# Altium PCB FPGA_Board.PcbDoc (part 9 of 10)
Units mm, origin at the board's own origin, x right, y up, seen from the top; angles counter-clockwise.
Board outline 103.63 x 86.08 mm, 2 copper layers (Top Layer, Bottom Layer); 109 components, 200 nets, 667 pads, 237 vias.
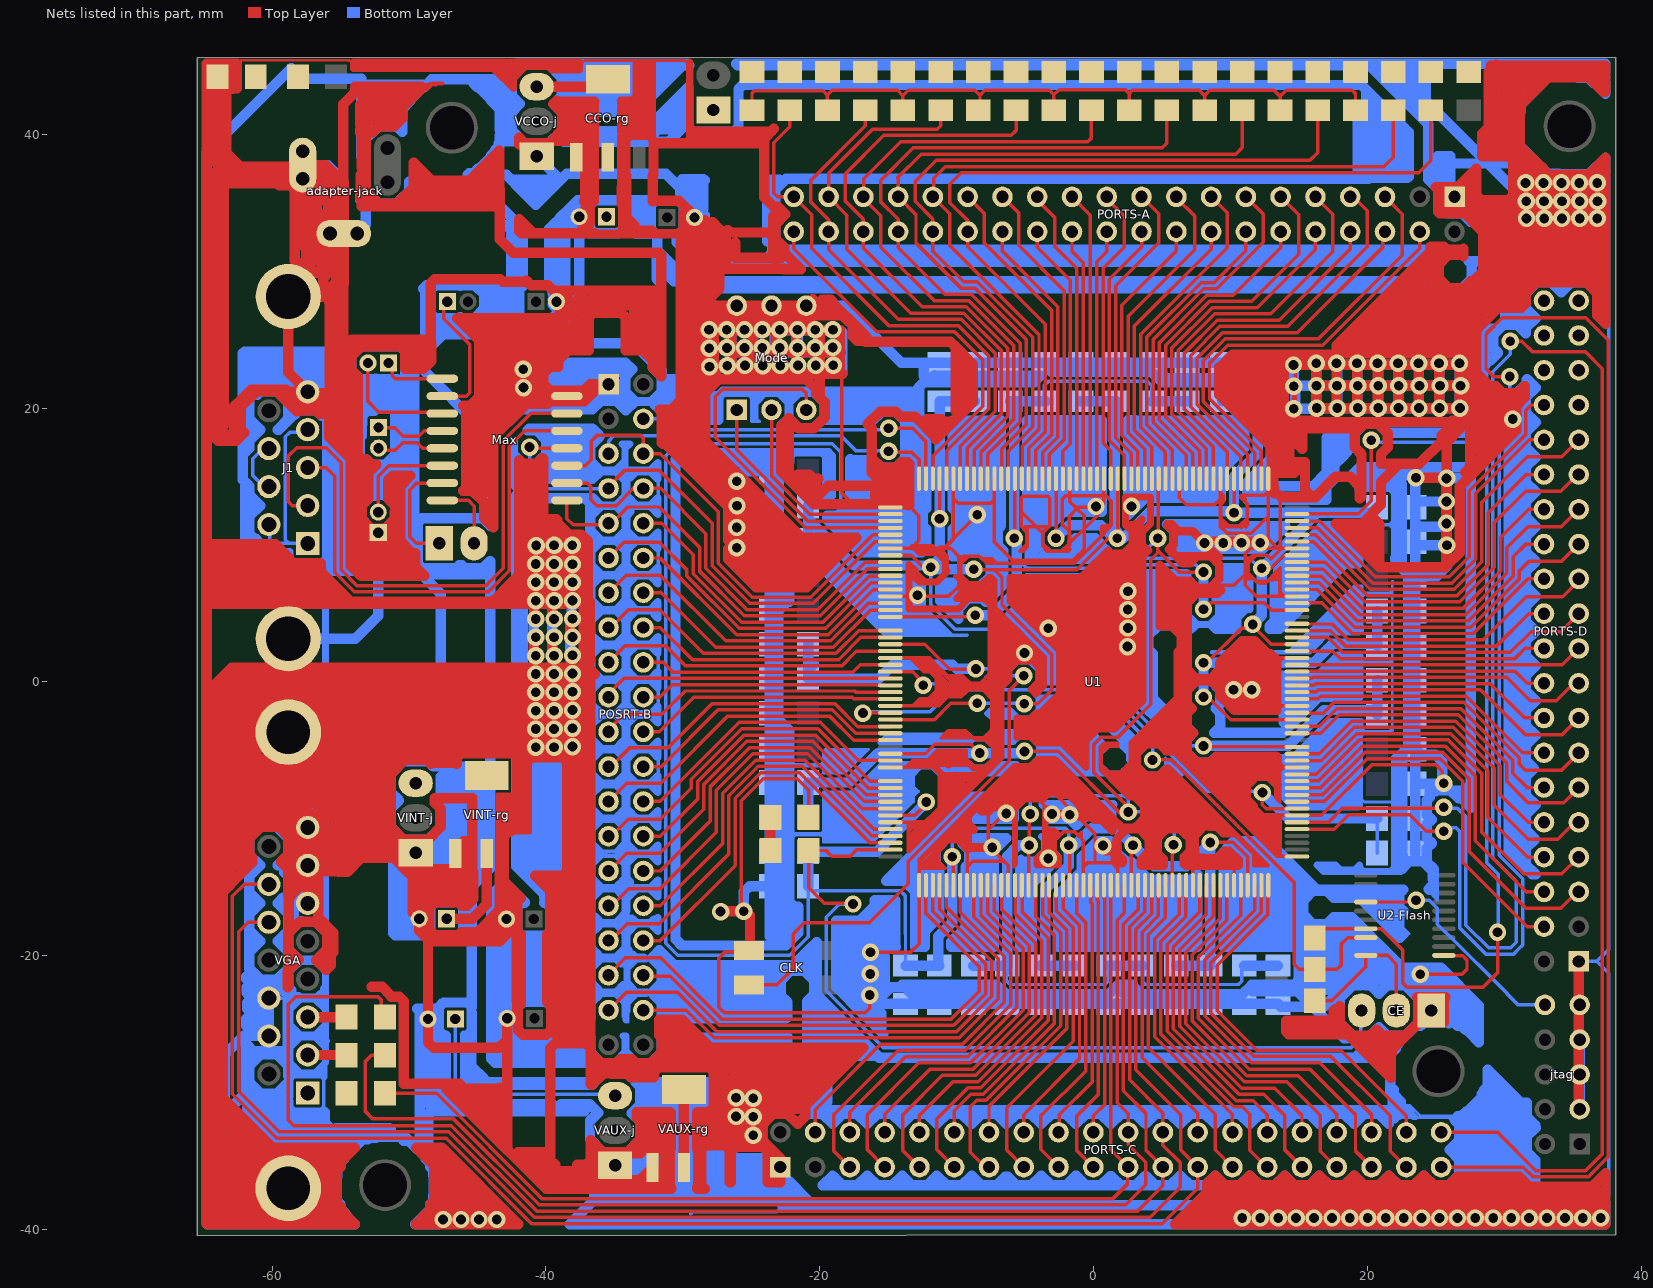
[diagram p9: the nets of this part, all layers, seen from the top]

## Via types
v1: diameter 1.27, hole 0.711, Top Layer to Bottom Layer, 237 vias

## Nets (pads, with @x,y where several pads share a name; then routed paths per layer and width w, separated by ;. In a path a pad name is that pad's centre, name@x,y a point inside that pad or via, vN(x,y) a via of type N, cw(c..) or ccw(c..) an arc to the next point about the centre after c; other vN are vias at no path point) (continued)
GND: (continued)
  Bottom Layer w0.762: 30.333,18.548 30.333,-12.366 32.032,-14.065 32.276,-14.065 31.559,-13.348 31.559,-12.166 32.238,-11.487 31.559,-10.808 31.559,-9.702 32.276,-8.985 31.559,-8.268 31.559,-6.92 32.155,-6.324 31.559,-5.728 31.559,-4.622 32.276,-3.905 31.559,-3.188 31.559,-2.082 32.276,-1.365 31.559,-0.648 31.559,0.458 32.276,1.175 31.559,1.892 31.559,2.998 32.276,3.715 31.559,4.432 31.559,5.538 32.276,6.255 31.559,6.972 31.559,8.078 32.276,8.795 31.559,9.512 31.559,10.618 32.276,11.335 31.559,12.052 31.559,13.158 32.276,13.875 31.559,14.592 31.559,15.698 32.276,16.415 31.559,17.132 31.559,18.238 32.276,18.955 31.559,19.672 31.559,20.778 32.276,21.495 31.652,22.12 31.619,22.087 31.619,21.795 31.111,21.287 31.111,20.655 30.333,19.877 v1@30.333,18.92 ; 30.598,26.094 30.543,26.149 30.543,28.322 30.901,28.322 30.998,28.419 30.998,26.752 31.182,26.568 31.55,26.568 31.076,26.094 30.93,26.094 ; 30.598,26.094 30.93,26.094 ; 30.763,-33.465 31.697,-32.531 31.264,-32.098 ; 30.93,26.094 31.559,25.465 31.559,25.858 32.276,26.575 31.559,27.292 31.559,28.398 32.038,28.877 ; 31.067,-31.439 31.067,-31.222 29.405,-29.56 29.198,-29.56 29.001,-29.757 29.001,-30.199 29.021,-30.179 29.985,-30.179 29.985,-30.307 30.467,-30.789 28.893,-30.789 28.893,-31.134 29.198,-31.439 31.067,-31.439 ; 31.067,-31.439 31.067,-31.901 31.264,-32.098 ; 31.067,-31.439 31.136,-31.439 31.264,-31.567 31.264,-32.098 ; v1@31.579,35.112 31.587,35.104 32.239,34.452 33.091,33.6 35.456,33.6 36.112,32.944 ; 31.725,42.698 31.725,42.714 31.741,42.73 31.741,42.942 31.773,42.974 ; 31.725,42.698 31.773,42.746 ; 31.725,42.698 31.125,42.098 31.125,39.149 33.142,37.132 33.99,37.132 34.058,37.064 36.159,37.064 37.387,38.292 37.387,37.175 37.097,37.175 36.938,37.016 36.784,37.016 v1@32.66,37.016 ; 31.773,42.746 31.773,42.974 ; 31.773,42.746 32.603,43.576 ; 31.773,42.974 31.773,43.323 32.026,43.576 ; 31.773,42.974 32.375,43.576 ; 32.026,43.576 32.359,43.909 32.391,43.877 32.533,43.877 32.533,43.734 32.375,43.576 ; 32.026,43.576 32.375,43.576 ; 32.038,28.877 32.34,29.179 33.466,29.179 ; 32.375,43.576 32.603,43.576 ; 32.603,43.576 33.21,44.183 35.31,44.183 ; v1@32.66,37.016 31.852,37.016 31.598,37.27 31.598,37.777 31.804,37.777 32.105,37.476 32.105,37.571 v1@32.66,37.016 ; v1@32.66,37.016 32.85,36.826 37.387,36.826 37.387,31.669 36.508,32.548 ; 33.466,29.179 34.88,29.179 ; 33.466,29.179 33.466,29.159 34.163,28.462 34.88,29.179 ; 34.88,29.179 35.116,29.179 ; 35.31,44.183 35.379,44.114 36.13,44.114 ; 35.31,44.183 36.062,44.183 36.13,44.114 ; 36.112,32.944 36.669,32.944 36.78,33.055 37.018,32.817 37.018,32.548 36.508,32.548 ; 36.112,32.944 36.508,32.548 ; 36.13,44.114 36.495,43.75 36.592,43.75 ; 36.13,44.114 36.227,44.114 36.408,43.933 ; 36.408,43.933 36.592,43.75 ; 36.592,43.75 37.387,43.75 37.387,42.955 36.592,43.75 ; v1@36.731,-38.783 v1@37.133,-38.783 ; v1@36.731,-38.783 37.133,-38.381 v1@37.133,-38.783 ; v1@37.133,-38.783 v1@37.387,-38.783
  other v1: -26.113,-30.38 -40.745,-4.777 -39.407,-4.781 -39.407,-3.442 -40.745,-3.438 -38.063,-3.391 -40.745,-2.1 -38.063,-2.059 -40.745,-0.761 -39.407,-0.764 -38.063,-0.726 -40.745,0.577 -39.407,0.575 -38.063,0.607 -40.745,1.916 -39.407,1.914 -38.063,1.939 -40.745,3.255 -39.407,3.253 -38.063,3.272 -40.745,4.593 -39.407,4.592 -38.063,4.605 -40.745,5.932 -39.407,5.931 -38.063,5.938 -40.745,7.27 -39.407,7.27 -38.063,7.27 -39.407,8.609 -38.063,8.603 14.625,19.95 -28.055,23.024 -26.757,23.093 -25.468,23.113 -24.176,23.102 -22.894,23.11 -21.597,23.116 -20.3,23.11 -19.017,23.137 -28.074,24.367 -26.785,24.394 -25.496,24.394 -24.207,24.4 -22.919,24.4 -21.63,24.4 -20.341,24.402 -28.086,25.716 -26.794,25.716 -25.502,25.716 -24.21,25.716 -22.918,25.716 -21.625,25.716 -20.333,25.716 -19.041,25.716 35.496,33.855 36.789,33.855 31.596,35.112 32.899,35.112 34.202,35.112 35.506,35.112 32.858,36.446 34.167,36.446 35.475,36.446 36.784,36.446
M0: Mode.1 U1.55 | length 16.3
  Top Layer w0.254: Mode.1@-26.065,19.865 -26.065,16.945 -20.87,11.75 U1.55@-14.847,11.75
M1: Mode.2 U1.54 | length 14.7
  Top Layer w0.254: Mode.2@-23.525,19.865 -23.525,15.051 -20.724,12.25 U1.54@-14.847,12.25
M2: Mode.3 U1.56 | length 26.7
  Top Layer w0.254: Mode.3@-20.985,19.865 -20.985,21.1 -21.27,21.385 -27.09,21.385 -27.65,20.825 -27.65,17.883 -21.017,11.25 U1.56@-14.847,11.25
Net390_2: 390.2 CE.2 U2-Flash.10 | length 11.7
  Top Layer w0.254: 390.2@16.15,-23.275 17.4,-23.275 19.875,-20.8 U2-Flash.10@19.875,-19.975 21.475,-19.975 22.11,-20.61 CE.2@22.11,-24.2
Neta-rs232_1: a-rs232.1 Max.7 | length 8.4
  Top Layer w0.254: a-rs232.1@-47.795,10.125 -49.482,10.125 -49.948,10.591 -49.948,14.012 -49.435,14.525 Max.7@-47.571,14.525
Neta-rs232_2: a-rs232.2 Max.8 | length 5.2
  Top Layer w0.254: Max.8@-47.571,13.255 -45.662,13.255 -45.232,12.825 -45.232,10.148 a-rs232.2@-45.255,10.125
Netblue_1: blue.1 PORTS-C.23 U1.137 | length 108
  Top Layer w0.254: blue.1@-51.763,-24.475 -52.014,-24.224 -52.014,-23.243 -52.267,-22.99 -58.277,-22.99 -58.828,-23.541 -58.828,-31.998 -58.419,-32.407 -46.919,-32.407 -40.679,-38.647 3.211,-38.647 5.058,-36.8 PORTS-C.23@5.058,-35.435 3.825,-34.202 3.825,-31.525 2.167,-29.867 2.167,-17.708 3.275,-16.6 3.275,-15.801 3.273,-15.799 3.273,-14.87 U1.137@3.253,-14.85
Netblue_2: blue.2 VGA.3 | length 3
  Top Layer w0.762: VGA.3@-57.402,-24.48 blue.2@-54.458,-24.48 ; blue.2@-54.568,-24.48 blue.2@-54.563,-24.475
NetC1_1: C1.1 Max.1 | length 4.7
  Top Layer w0.254: C1.1@-51.25,23.3 -51.227,23.277 -51.227,22.375 -50.997,22.145 Max.1@-47.571,22.145
NetC1_2: C1.2 Max.3 | length 8.6
  Top Layer w0.254: C1.2@-53,23.3 -53,20.5 -52.2,19.7 -47.666,19.7 Max.3@-47.571,19.605
NetC2_1: C2.1 Max.4 | length 5.1
  Top Layer w0.254: C2.1@-52.225,18.575 -51.046,18.575 -50.421,17.95 -49.28,17.95 -48.895,18.335 Max.4@-47.571,18.335
NetC2_2: C2.2 Max.5 | length 5.1
  Top Layer w0.254: C2.2@-52.225,17.075 -52.054,16.904 -51.032,16.904 -50.461,17.475 -49.4,17.475 -49,17.075 -48.21,17.075 -48.2,17.065 Max.5@-47.571,17.065
NetC4_1: C4.1 Max.2 | length 9.5
  Top Layer w0.254: Max.2@-47.571,20.875 -45.823,20.875 -45.573,21.125 -45.573,24.645 -47.453,26.525 C4.1@-47.453,27.775
NetC5_2: C5.2 Max.6 | length 7.4
  Top Layer w0.254: C5.2@-52.25,12.65 -52.25,15.016 -51.491,15.775 -47.591,15.775 Max.6@-47.571,15.795
NetCCO-rg_2: CCO-rg.2 CCO-rg.4 VCCO-j.3 Vcco.1 | length 5.4
  Top Layer w0.762: VCCO-j.3@-40.678,43.48 -36.024,43.48 CCO-rg.4@-35.479,44.025
NetCE_3: CE.3 Config-Done.1 U1.103 | length 63.4
  Top Layer w0.254: v1(-17.575,-16.225) -17.625,-16.175 -19.675,-16.175 -20.805,-15.045 Config-Done.1@-20.805,-12.313 -19.544,-12.313 -19.135,-12.722 -17.776,-12.722 -17.323,-12.27 -15.409,-12.27 -15.389,-12.25 U1.103@-14.847,-12.25
  Bottom Layer w0.254: v1(-17.575,-16.225) -18.575,-16.225 -19.525,-17.175 -19.525,-22.55 -15.35,-26.725 18.8,-26.725 19.525,-26 19.525,-24.245 CE.3@19.57,-24.2
NetCF-4.7k_2: CF-4.7k.2 U1.207 U2-Flash.7 | length 74.2
  Top Layer w0.254: U1.207@15.35,12.27 19.32,12.27 20.275,13.225 v1(20.275,17.65) ; CF-4.7k.2@16.15,-18.7 16.825,-18.025 U2-Flash.7@19.875,-18.025 21.009,-18.025 22.567,-19.583 22.567,-21.992 22.89,-22.315 28.435,-22.315 29.5,-21.25 v1(29.5,-18.275) v1@29.8,-18.275
  Bottom Layer w0.254: v1(20.275,17.65) 20.425,17.5 27.425,17.5 28.707,16.218 28.707,-13.2 29.55,-14.043 29.55,-18.225 v1(29.5,-18.275)
NetCLK_3: CLK.3 U1.77 | length 45.4
  Top Layer w0.254: CLK.3@-25.175,-22.125 -23.15,-22.125 -21.925,-20.9 -21.925,-18.4 -21.125,-17.6 -16.4,-17.6 -13.528,-14.728 -13.528,-13.1 -6.175,-5.747 -6.175,-0.625 v1(-5.1,0.45) ; U1.77@-14.847,0.75 -13.225,0.75 -12.8,0.325 -12.8,0.1 v1(-12.45,-0.25)
  Bottom Layer w0.254: v1(-12.45,-0.25) -12.328,-0.128 -6.778,-0.128 -6.2,0.45 v1(-5.1,0.45)
NetConfig-Done_2: Config-Done.2 R-Done.1 | length 2.4
  Top Layer w0.762: Config-Done.2@-23.605,-12.313 R-Done.1@-23.605,-9.9
NetGReen_1: GReen.1 PORTS-C.22 U1.135 | length 88.7
  Top Layer w0.254: GReen.1@-51.763,-27.263 -52.741,-27.263 -53.185,-27.707 -53.185,-31.379 -52.675,-31.889 -46.79,-31.889 -40.49,-38.189 2.35,-38.189 3.817,-36.723 3.817,-35.097 2.518,-33.798 PORTS-C.22@2.518,-32.895 2.518,-31.533 1.71,-30.725 1.71,-17.415 2.25,-16.875 2.25,-14.853 U1.135@2.253,-14.85
NetGReen_2: GReen.2 VGA.2 | length 3
  Top Layer w0.762: VGA.2@-57.402,-27.25 GReen.2@-54.465,-27.25 ; GReen.2@-54.575,-27.25 GReen.2@-54.563,-27.263
NetJ1_1: J1.1 J1.4 J1.6 | length 13.8
  Bottom Layer w0.254: J1.6@-60.242,11.495 -60.175,11.428 -60.175,10.35 -59.935,10.11 -58.762,10.11 ; J1.1@-57.402,10.11 -58.762,10.11 ; J1.4@-57.402,18.42 -57.572,18.25 -58.685,18.25 -59.037,17.898 -59.037,10.385 -58.762,10.11
NetJ1_2: J1.2 Max.14 | length 45.2
  Top Layer w0.254: J1.2@-57.402,12.88 -58.537,12.88 -58.839,13.182 -58.839,16.468 -58.207,17.1 -56.054,17.1 -54.961,16.007 -54.961,8.192 -53.805,7.036 -44.391,7.036 -43.131,8.296 -43.131,17.6 -41.126,19.605 Max.14@-38.471,19.605
  Bottom Layer w0.254: J1.2@-57.402,12.88 J1.2@-57.147,12.625
NetJ1_3: J1.3 Max.13 | length 37.3
  Top Layer w0.254: J1.3@-57.708,15.65 J1.3@-57.402,15.65 -56.043,15.65 -55.418,15.025 -55.418,8.002 -53.994,6.579 -44.202,6.579 -42.674,8.107 -42.674,17.203 -41.542,18.335 Max.13@-38.471,18.335
NetJ1_7: J1.7 J1.8 | length 4.2
  Bottom Layer w0.254: J1.7@-60.242,14.265 -60.615,14.265 -61.425,15.075 -61.425,16.3 -60.69,17.035 J1.8@-60.242,17.035
Netjtag_10: jtag.10 U2-Flash.4 | length 17
  Top Layer w0.254: U2-Flash.4@19.875,-16.075 v1@23.575,-16.075
  Bottom Layer w0.254: v1(23.55,-15.95) 24.525,-15.95 25.107,-16.532 25.107,-17.703 25.689,-18.286 25.725,-18.286 30.225,-22.785 30.225,-22.822 30.993,-23.59 jtag.10@32.96,-23.59
NetLED1_1: LED1.1 RL-1.1
NetLED1_2: LED1.2 PORTS-A.30 U1.36 | length 64
  Top Layer w0.254: U1.36@-4.747,14.85 U1.36@-4.727,14.87 ; U1.36@-4.727,15.275 -4.727,17.059 -3.533,18.253 -3.533,26.111 -9.2,31.778 PORTS-A.30@-9.2,32.889 -9.2,33.7 -10.5,35 -10.5,36.35 -9.675,37.175 23.75,37.175 24.633,38.058 LED1.2@24.633,41.75
NetLED2_1: LED2.1 RL-2.1
NetLED2_2: LED2.2 PORTS-A.31 U1.37 | length 62.7
  Top Layer w0.254: U1.37@-5.247,14.85 U1.37@-5.227,14.87 ; U1.37@-5.227,15.5 -5.227,17.206 -3.99,18.443 -3.99,25.365 -10.5,31.875 -10.5,34.189 PORTS-A.31@-11.74,35.429 -11.675,35.494 -11.675,36.8 -10.843,37.632 21.2,37.632 21.879,38.311 LED2.2@21.879,41.75
NetLED3_1: LED3.1 RL-3.1
NetLED3_2: LED3.2 PORTS-A.32 U1.39 | length 59.9
  Top Layer w0.254: U1.39@-6.247,14.85 -6.227,14.87 -6.227,16.852 -4.447,18.632 -4.447,25.176 -8.497,29.225 -9.5,29.225 -11.74,31.465 PORTS-A.32@-11.74,32.889 -11.74,33.807 -13.025,35.092 -13.025,36.55 -11.486,38.089 15.8,38.089 16.369,38.658 LED3.2@16.369,41.75
NetLED4_1: LED4.1 RL-4.1
NetLED4_2: LED4.2 PORTS-A.33 U1.40 | length 56
  Top Layer w0.254: U1.40@-6.747,14.85 -6.727,14.87 -6.727,16.999 -4.905,18.821 -4.905,24.986 -8.686,28.768 -9.689,28.768 -12.975,32.053 -12.975,34.124 PORTS-A.33@-14.28,35.429 -14.28,36.78 -14.325,36.825 -12.603,38.547 10.375,38.547 10.86,39.031 LED4.2@10.86,41.75
NetLED5_1: LED5.1 RL-5.1
NetLED5_2: LED5.2 PORTS-A.34 U1.42 | length 52.4
  Top Layer w0.254: U1.42@-7.727,14.95 -7.727,16.645 -5.362,19.011 -5.362,24.747 -8.925,28.311 -10.886,28.311 -14.28,31.705 PORTS-A.34@-14.28,32.889 -14.28,33.778 -15.55,35.048 -15.55,36.625 -13.171,39.004 5,39.004 5.35,39.354 LED5.2@5.35,41.75
NetLED6_1: LED6.1 RL-6.1
NetLED6_2: LED6.2 PORTS-A.35 U1.43 | length 49.1
  Top Layer w0.254: U1.43@-8.247,14.85 -8.247,15.775 -8.227,15.795 ; U1.43@-8.227,15.575 -8.227,15.795 ; LED6.2@-0.159,41.75 -0.159,39.727 -0.425,39.461 -14.089,39.461 -16.8,36.75 -16.8,35.449 PORTS-A.35@-16.82,35.429 -16.82,35.32 -15.55,34.05 -15.55,31.75 -11.653,27.853 -9.114,27.853 -5.819,24.558 -5.819,19.2 -8.227,16.792 -8.227,15.795
NetLED7_1: LED7.1 RL-7.1
NetLED7_2: LED7.2 PORTS-A.36 U1.44 | length 45.3
  Top Layer w0.254: U1.44@-8.747,14.85 -8.727,14.87 -8.727,16.939 -6.276,19.39 -6.276,24.369 -9.304,27.396 -12.521,27.396 -16.82,31.695 PORTS-A.36@-16.82,32.889 -16.82,33.809 -18.125,35.114 -18.125,37.125 -15.332,39.918 -6.025,39.918 -5.669,40.274 LED7.2@-5.669,41.75
NetLED8_1: LED8.1 RL-8.1
NetLED8_2: LED8.2 PORTS-A.37 U1.45 | length 41.6
  Top Layer w0.254: LED8.2@-11.178,41.75 -11.178,40.629 -11.432,40.375 -16.151,40.375 -19.36,37.166 PORTS-A.37@-19.36,35.429 -18.025,34.094 -18.025,31.6 -13.364,26.939 -9.493,26.939 -6.733,24.179 -6.733,19.579 -9.227,17.085 -9.227,14.87 U1.45@-9.247,14.85
NetLED9_1: LED9.1 RL-9.1
NetLED9_2: LED9.2 PORTS-A.38 U1.46 | length 37.9
  Top Layer w0.254: LED9.2@-16.688,41.75 -16.688,40.612 -20.675,36.625 -20.675,35.05 -19.36,33.735 PORTS-A.38@-19.36,32.889 -19.36,31.56 -14.282,26.482 -9.683,26.482 -7.191,23.99 -7.191,19.768 -9.747,17.212 U1.46@-9.747,14.85 U1.46@-9.727,14.87
NetLED10_1: LED10.1 RL-10.1
NetLED10_2: LED10.2 PORTS-A.39 U1.48 | length 38.8
  Top Layer w0.254: LED10.2@-22.197,41.75 -22.197,40.547 -23.359,39.386 -23.359,35.702 -23.086,35.429 PORTS-A.39@-21.9,35.429 -20.6,34.129 -20.6,31.675 -14.95,26.025 -9.872,26.025 -7.648,23.8 -7.648,19.958 -10.727,16.878 -10.727,14.87 U1.48@-10.747,14.85
NetLEDS-jumper_1: LEDS-jumper.1 RL-2.2 RL-3.2 RL-4.2 RL-5.2 RL-6.2 RL-7.2 RL-8.2 RL-9.2 RL-10.2 | length 56.6
  Top Layer w0.254: RL-10.2@-24.952,41.75 -24.952,42.998 -24.775,43.175 -19.75,43.175 -19.443,42.868 ; RL-9.2@-19.443,41.75 -19.443,42.868 ; RL-8.2@-13.933,41.75 -13.933,42.825 ; RL-7.2@-8.424,41.75 -8.3,41.874 -8.3,42.85 ; RL-6.2@-2.914,41.75 -2.9,41.764 -2.9,42.875 ; RL-5.2@2.595,41.75 2.6,41.755 2.6,42.975 ; RL-4.2@8.105,41.75 8.1,41.755 8.1,42.825 ; RL-3.2@13.614,41.75 13.614,42.761 ; RL-2.2@19.124,41.75 19.125,41.751 19.125,42.975 18.9,43.2 14.054,43.2 13.614,42.761 ; -19.443,42.868 -19.11,43.2 -14.308,43.2 -13.933,42.825 ; -13.933,42.825 -13.533,43.225 -8.675,43.225 -8.3,42.85 ; -8.3,42.85 -7.95,43.2 -3.225,43.2 -2.9,42.875 ; -2.9,42.875 -2.525,43.25 2.325,43.25 2.6,42.975 ; 2.6,42.975 2.825,43.2 7.725,43.2 8.1,42.825 ; 8.1,42.825 8.475,43.2 13.175,43.2 13.614,42.761
NetMax_9: Max.9 POSRT-B.9 U1.62 | length 31.8
  Top Layer w0.254: Max.9@-38.471,13.255 -38.471,11.925 -38.021,11.475 -35.544,11.475 POSRT-B.9@-35.429,11.59 ; POSRT-B.9@-35.429,11.194 POSRT-B.9@-35.429,11.59 ; U1.62@-14.847,8.25 -16.526,8.25 -19.954,4.822 -25.507,4.822 -28.784,8.098 -28.784,9.834 -31.725,12.775 -34.022,12.775 -35.207,11.59 POSRT-B.9@-35.429,11.59
NetMax_10: Max.10 POSRT-B.8 U1.61 | length 31.4
  Top Layer w0.254: Max.10@-38.471,14.525 -36.979,14.525 -36.729,14.275 -36.729,13.3 -36.304,12.875 -34.873,12.875 -33.618,14.13 POSRT-B.8@-32.889,14.13 -31.63,14.13 -28.327,10.827 -28.327,8.288 -25.318,5.279 -20.143,5.279 -16.692,8.73 U1.61@-15.45,8.73
NetMax_11: Max.11 POSRT-B.6 U1.57 | length 35
  Top Layer w0.254: Max.11@-38.471,15.795 -37.142,15.795 -36.7,16.237 -36.7,17.575 -36.275,18 -33.075,18 -32.889,17.814 POSRT-B.6@-32.889,16.67 -31.645,16.67 -27.412,12.437 -27.412,8.667 -24.939,6.194 -20.671,6.194 -16.115,10.75 U1.57@-14.847,10.75
NetMax_12: Max.12 POSRT-B.7 U1.58 | length 39.8
  Top Layer w0.254: v1(-41.195,17.15) -41.11,17.065 Max.12@-38.471,17.065 ; POSRT-B.7@-35.429,14.13 -35.429,14.271 -34.225,15.475 -31.75,15.475 -27.869,11.594 -27.869,8.477 -25.129,5.736 -20.482,5.736 -15.968,10.25 U1.58@-14.847,10.25
  Bottom Layer w0.254: v1(-41.195,17.15) -41.195,15.324 -39.996,14.125 -35.434,14.125 POSRT-B.7@-35.429,14.13
Neto-aux_1: o-aux.1 VAUX-j.3 VAUX-rg.2 VAUX-rg.4 | length 22.6
  Top Layer w0.762: VAUX-rg.2@-29.925,-35.475 VAUX-rg.4@-29.925,-29.775
  Bottom Layer w0.254: o-aux.1@-46.619,-24.625 -46.619,-29.651 -46.145,-30.125 -35.045,-30.125 VAUX-j.3@-34.95,-30.22
NetOE-4.7K_2: OE-4.7K.2 U1.83 U2-Flash.8 | length 54
  Top Layer w0.254: v1(-16.85,-2.275) -16.719,-2.275 -16.64,-2.195 -16.64,-2.165 -16.625,-2.15 -16.525,-2.25 U1.83@-14.847,-2.25 ; v1(4.3,-5.7) 5.7,-5.7 14.65,-14.65 14.65,-20.625 15.025,-21 OE-4.7K.2@16.15,-21 17.775,-21 18.1,-20.675 18.1,-19.125 18.55,-18.675 U2-Flash.8@19.875,-18.675
  Bottom Layer w0.254: v1(-16.85,-2.275) -16.77,-2.195 -11.97,-2.195 -10.36,-0.585 0.238,-0.585 4.3,-4.647 v1(4.3,-5.7)
Netoint_1: oint.1 VINT-j.3 VINT-rg.2 VINT-rg.4 | length 7.1
  Top Layer w0.762: oint.1@-47.257,-17.3 -45.376,-17.3 -44.332,-16.256 VINT-rg.2@-44.332,-12.54
NetP-LED_2: P-LED.2 P_Led_390.1
NetPORTS-A_4: PORTS-A.4 U1.2 | length 30
  Top Layer w0.254: U1.2@12.253,14.85 12.253,16.881 8.463,20.671 8.463,23.265 9.79,24.592 16.742,24.592 23.82,31.67 PORTS-A.4@23.82,32.889
NetPORTS-A_5: PORTS-A.5 U1.3 | length 32.7
  Top Layer w0.254: U1.3@11.753,14.85 11.753,16.735 8.006,20.482 8.006,23.454 9.601,25.05 16.425,25.05 22.55,31.175 22.55,34.159 PORTS-A.5@21.28,35.429
NetPORTS-A_6: PORTS-A.6 U1.4 | length 28.5
  Top Layer w0.254: U1.4@11.233,14.87 U1.4@11.253,14.85 ; U1.4@11.273,14.87 U1.4@11.253,14.85 ; PORTS-A.6@21.28,32.889 21.1,32.709 21.1,31.725 14.882,25.507 9.411,25.507 7.548,23.644 7.548,20.293 11.253,16.588 U1.4@11.253,14.85
NetPORTS-A_7: PORTS-A.7 U1.5 | length 31
  Top Layer w0.254: U1.5@10.773,14.87 U1.5@10.753,14.85 10.753,16.442 7.091,20.103 7.091,23.833 9.222,25.964 14.164,25.964 19.975,31.775 19.975,34.425 18.971,35.429 PORTS-A.7@18.74,35.429
NetPORTS-A_8: PORTS-A.8 U1.7 | length 27
  Top Layer w0.254: U1.7@9.773,14.87 U1.7@9.753,14.85 9.753,16.795 6.634,19.914 6.634,24.023 9.033,26.421 13.546,26.421 18.74,31.615 PORTS-A.8@18.74,32.889
NetPORTS-A_9: PORTS-A.9 U1.9 | length 29.3
  Top Layer w0.254: U1.9@8.773,14.87 U1.9@8.753,14.85 8.753,17.148 6.177,19.725 6.177,24.212 8.843,26.878 12.928,26.878 17.475,31.425 17.475,34.154 PORTS-A.9@16.2,35.429
NetPORTS-A_10: PORTS-A.10 U1.10 | length 25.4
  Top Layer w0.254: U1.10@8.273,14.87 U1.10@8.253,14.85 8.233,14.87 8.233,17.022 5.72,19.535 5.72,24.401 8.654,27.336 11.961,27.336 16.2,31.575 PORTS-A.10@16.2,32.889
NetPORTS-A_11: PORTS-A.11 U1.11 | length 27.6
  Top Layer w0.254: U1.11@7.733,15.25 7.733,16.875 5.262,19.346 5.262,24.591 8.465,27.793 11.543,27.793 14.975,31.225 14.975,34.114 PORTS-A.11@13.66,35.429 ; U1.11@7.753,14.85 U1.11@7.773,14.87
NetPORTS-A_12: PORTS-A.12 U1.12 | length 23.9
  Top Layer w0.254: U1.12@7.233,14.87 U1.12@7.253,14.85 ; U1.12@7.273,14.87 U1.12@7.253,14.85 ; PORTS-A.12@13.66,32.889 13.66,31.71 10.2,28.25 8.275,28.25 4.818,24.792 4.805,24.792 4.805,19.156 7.253,16.709 U1.12@7.253,14.85
NetPORTS-A_13: PORTS-A.13 U1.13 | length 26
  Top Layer w0.254: U1.13@6.773,14.87 U1.13@6.753,14.85 6.753,16.562 4.348,18.967 4.348,25.005 8.05,28.707 8.979,28.707 12.375,32.103 12.375,34.174 PORTS-A.13@11.12,35.429
NetPORTS-A_14: PORTS-A.14 U1.15 | length 22.4
  Top Layer w0.254: U1.15@5.773,14.87 U1.15@5.753,14.85 5.733,14.87 5.733,16.935 3.891,18.778 3.891,25.194 7.861,29.164 8.789,29.164 11.12,31.495 PORTS-A.14@11.12,32.889
NetPORTS-A_15: PORTS-A.15 U1.16 | length 24.4
  Top Layer w0.254: U1.16@5.253,14.85 5.233,14.87 5.233,16.789 3.434,18.588 3.434,25.384 9.75,31.7 9.75,34.259 PORTS-A.15@8.58,35.429
NetPORTS-A_16: PORTS-A.16 U1.18 | length 20.9
  Top Layer w0.254: U1.18@4.253,14.85 4.233,14.87 4.233,17.142 2.976,18.399 2.976,25.998 8.58,31.602 PORTS-A.16@8.58,32.889
NetPORTS-A_17: PORTS-A.17 U1.19 | length 23.7
  Top Layer w0.254: U1.19@3.753,14.85 3.733,14.87 3.733,16.996 2.519,18.21 2.519,26.694 7.375,31.55 7.375,34.025 6.04,35.36 PORTS-A.17@6.04,35.429
NetPORTS-A_18: PORTS-A.18 U1.20 | length 20.2
  Top Layer w0.254: U1.20@3.273,14.87 U1.20@3.253,14.85 3.233,14.87 3.233,16.849 2.062,18.02 2.062,27.498 6.04,31.476 PORTS-A.18@6.04,32.889
NetPORTS-A_19: PORTS-A.19 U1.21 | length 22.7
  Top Layer w0.254: U1.21@2.733,15.05 2.733,16.702 1.605,17.831 1.605,28.93 4.75,32.075 4.75,34.179 PORTS-A.19@3.5,35.429
NetPORTS-A_20: PORTS-A.20 U1.22 | length 19.5
  Top Layer w0.254: U1.22@2.253,14.85 2.233,14.87 2.233,16.556 1.148,17.641 1.148,29.423 3.5,31.775 PORTS-A.20@3.5,32.889
NetPORTS-A_21: PORTS-A.21 U1.24 | length 22
  Top Layer w0.254: PORTS-A.21@0.96,35.429 0.96,35.29 2.225,34.025 2.225,31.758 0.69,30.223 0.69,17.452 1.25,16.892 1.25,14.853 U1.24@1.253,14.85 U1.24@1.273,14.87
NetPORTS-A_22: PORTS-A.22 U1.26 | length 17.9
  Top Layer w0.254: U1.26@0.233,15.25 0.233,30.698 0.96,31.425 PORTS-A.22@0.96,32.889
NetPORTS-A_23: PORTS-A.23 U1.27 | length 21.1
  Top Layer w0.254: PORTS-A.23@-1.58,35.429 -0.247,34.096 U1.27@-0.247,14.85
NetPORTS-A_24: PORTS-A.24 U1.28 | length 18.4
  Top Layer w0.254: PORTS-A.24@-1.58,32.889 -1.58,31.451 -0.747,30.618 U1.28@-0.747,14.85 U1.28@-0.727,14.87
NetPORTS-A_25: PORTS-A.25 U1.29 | length 21.8
  Top Layer w0.254: PORTS-A.25@-4.12,35.429 -4.12,35.195 -2.825,33.9 -2.825,31.789 -1.247,30.211 U1.29@-1.247,14.85
NetPORTS-A_26: PORTS-A.26 U1.31 | length 19.3
  Top Layer w0.254: PORTS-A.26@-4.12,32.889 -4.12,31.745 -1.704,29.329 -1.704,17.396 -2.25,16.85 -2.25,14.853 U1.31@-2.247,14.85 U1.31@-2.227,14.87
NetPORTS-A_27: PORTS-A.27 U1.33 | length 22.9
  Top Layer w0.254: PORTS-A.27@-6.66,35.429 -5.481,34.25 -5.481,31.881 -2.161,28.561 -2.161,17.685 -3.227,16.619 -3.227,14.87 U1.33@-3.247,14.85
NetPORTS-A_28: PORTS-A.28 U1.34 | length 20.2
  Top Layer w0.254: PORTS-A.28@-6.66,32.889 -6.66,31.452 -2.619,27.411 -2.619,17.875 -3.727,16.766 U1.34@-3.727,14.85
NetPORTS-A_29: PORTS-A.29 U1.35 | length 23
  Top Layer w0.254: PORTS-A.29@-9.2,35.429 -7.975,34.204 -7.975,32.035 -3.076,27.136 -3.076,18.064 -4.227,16.913 U1.35@-4.227,15.45 ; U1.35@-4.247,14.85 U1.35@-4.227,14.87
NetPORTS-A_40: PORTS-A.40 U1.50 | length 27.7
  Top Layer w0.254: PORTS-A.40@-21.9,32.889 -21.9,31.625 -15.842,25.567 -10.162,25.567 -8.105,23.511 -8.105,20.147 -11.727,16.525 -11.727,15.75
NetPORTS-C_4: PORTS-C.4 U1.111 | length 28.6
  Top Layer w0.254: PORTS-C.4@-20.342,-32.895 -20.342,-31.242 -15.55,-26.45 -9.566,-26.45 -6.519,-23.404 -6.519,-20.037 -9.747,-16.809 U1.111@-9.747,-14.85
NetPORTS-C_5: PORTS-C.5 U1.113 | length 30.4
  Top Layer w0.254: PORTS-C.5@-17.802,-35.435 -18.975,-34.262 -18.975,-31.625 -14.257,-26.907 -9.376,-26.907 -6.062,-23.593 -6.062,-19.848 -8.747,-17.163 U1.113@-8.747,-14.85
NetPORTS-C_6: PORTS-C.6 U1.114 | length 26.3
  Top Layer w0.254: PORTS-C.6@-17.802,-32.895 -17.802,-31.427 -13.739,-27.364 -9.187,-27.364 -5.605,-23.782 -5.605,-19.658 -8.227,-17.036 U1.114@-8.227,-15.4
NetPORTS-C_7: PORTS-C.7 U1.115 | length 28.9
  Top Layer w0.254: PORTS-C.7@-15.262,-35.435 -16.55,-34.147 -16.55,-31.6 -12.772,-27.822 -8.998,-27.822 -5.148,-23.972 -5.148,-19.469 -7.727,-16.889 U1.115@-7.727,-15.05
NetPORTS-C_8: PORTS-C.8 U1.116 | length 25.3
  Top Layer w0.254: PORTS-C.8@-15.262,-32.895 -15.262,-31.587 -11.954,-28.279 -8.808,-28.279 -4.691,-24.161 -4.691,-19.279 -7.247,-16.723 U1.116@-7.247,-14.85
NetPORTS-C_9: PORTS-C.9 U1.117 | length 26.9
  Top Layer w0.254: PORTS-C.9@-12.722,-35.435 -13.925,-34.232 -13.925,-31.6 -11.061,-28.736 -8.619,-28.736 -4.233,-24.351 -4.233,-19.09 -6.727,-16.596 U1.117@-6.727,-15.475
NetPORTS-C_10: PORTS-C.10 U1.119 | length 23.1
  Top Layer w0.254: PORTS-C.10@-12.722,-32.895 -12.722,-31.647 -10.268,-29.193 -8.43,-29.193 -3.776,-24.54 -3.776,-18.901 -5.727,-16.95 U1.119@-5.727,-15.35
NetPORTS-C_11: PORTS-C.11 U1.120 | length 25.8
  Top Layer w0.254: PORTS-C.11@-10.182,-35.435 -11.475,-34.142 -11.475,-31.95 -9.175,-29.65 -8.24,-29.65 -3.319,-24.729 -3.319,-18.711 -5.227,-16.803 -5.227,-14.87 U1.120@-5.247,-14.85
NetPORTS-C_12: PORTS-C.12 U1.122 | length 22.2
  Top Layer w0.254: PORTS-C.12@-10.182,-32.895 -10.182,-31.325 -8.965,-30.108 -8.051,-30.108 -2.862,-24.919 -2.862,-18.522 -4.227,-17.156 -4.227,-14.87 U1.122@-4.247,-14.85
NetPORTS-C_13: PORTS-C.13 U1.123 | length 25
  Top Layer w0.254: PORTS-C.13@-7.642,-35.435 -7.915,-35.435 -9,-34.35 -9,-31.025 -8.54,-30.565 -7.861,-30.565 -2.405,-25.108 -2.405,-18.333 -3.727,-17.01 -3.727,-14.87 U1.123@-3.747,-14.85
NetPORTS-C_14: PORTS-C.14 U1.124 | length 20.9
  Top Layer w0.254: PORTS-C.14@-7.642,-32.895 -7.642,-30.992 -1.947,-25.297 -1.947,-18.143 -3.227,-16.863 -3.227,-14.87 U1.124@-3.247,-14.85
NetPORTS-C_15: PORTS-C.15 U1.125 | length 23.6
  Top Layer w0.254: PORTS-C.15@-5.102,-35.435 -6.35,-34.187 -6.35,-31.1 -1.49,-26.24 -1.49,-17.954 -2.727,-16.717 -2.727,-14.87 U1.125@-2.747,-14.85
NetPORTS-C_16: PORTS-C.16 U1.126 | length 20.2
  Top Layer w0.254: PORTS-C.16@-5.102,-32.895 -5.102,-31.602 -1.033,-27.533 -1.033,-17.764 -2.227,-16.57 -2.227,-14.87 U1.126@-2.247,-14.85
NetPORTS-C_17: PORTS-C.17 U1.128 | length 22.8
  Top Layer w0.254: PORTS-C.17@-2.562,-35.435 -3.85,-34.147 -3.85,-31.7 -0.576,-28.426 -0.576,-17.575 -1.247,-16.904 U1.128@-1.247,-14.85
NetPORTS-C_18: PORTS-C.18 U1.130 | length 19.1
  Top Layer w0.254: PORTS-C.18@-2.562,-32.895 -2.5,-32.833 -2.5,-31.625 -0.119,-29.244 -0.119,-16.201 -0.227,-16.092 -0.227,-14.87 U1.130@-0.247,-14.85
NetPORTS-C_19: PORTS-C.19 U1.131 | length 21.8
  Top Layer w0.254: PORTS-C.19@-0.022,-35.435 -1.25,-34.207 -1.25,-31.725 0.339,-30.136 0.339,-16.011 0.273,-15.946 0.273,-14.87 U1.131@0.253,-14.85
NetPORTS-C_20: PORTS-C.20 U1.132 | length 18.4
  Top Layer w0.254: PORTS-C.20@-0.022,-32.895 -0.022,-31.697 0.796,-30.879 0.796,-15.822 0.773,-15.799 0.773,-14.87 U1.132@0.753,-14.85
NetPORTS-C_21: PORTS-C.21 RED.1 U1.133 | length 80.2
  Top Layer w0.254: RED.1@-51.763,-30.05 -47.983,-30.05 -40.3,-37.732 1.415,-37.732 2.473,-36.675 2.473,-35.48 PORTS-C.21@2.518,-35.435 1.253,-34.17 U1.133@1.253,-14.85
NetPORTS-C_24: PORTS-C.24 U1.138 VGA.13 | length 111.7
  Top Layer w0.254: VGA.13@-60.242,-17.555 -61.742,-17.555 -62.447,-18.26 -62.447,-29.9 -59.483,-32.864 -47.108,-32.864 -40.869,-39.104 4.132,-39.104 6.336,-36.9 6.336,-35.105 5.058,-33.827 PORTS-C.24@5.058,-32.895 5.058,-31.483 2.625,-29.05 2.625,-17.897 3.733,-16.788 3.733,-14.87 U1.138@3.753,-14.85
NetPORTS-C_25: PORTS-C.25 U1.139 VGA.14 | length 117.4
  Top Layer w0.254: VGA.14@-60.242,-14.785 -62.022,-14.785 -62.904,-15.667 -62.904,-30.089 -59.672,-33.321 -47.298,-33.321 -41.058,-39.561 5.012,-39.561 7.598,-36.975 PORTS-C.25@7.598,-35.435 6.35,-34.187 6.35,-31.6 3.082,-28.332 3.082,-18.086 4.233,-16.935 4.233,-14.87 U1.139@4.253,-14.85
NetPORTS-C_26: PORTS-C.26 U1.140 | length 20.2
  Top Layer w0.254: U1.140@4.753,-14.85 4.733,-14.87 4.733,-17.082 3.539,-18.276 3.539,-27.439 7.598,-31.498 PORTS-C.26@7.598,-32.895
NetPORTS-C_27: PORTS-C.27 U1.141 | length 23.7
  Top Layer w0.254: U1.141@5.253,-14.85 5.233,-14.87 5.233,-17.228 3.996,-18.465 3.996,-26.696 8.875,-31.575 8.875,-34.175 8.878,-34.175 PORTS-C.27@10.138,-35.435
NetPORTS-C_28: PORTS-C.28 U1.143 | length 21.1
  Top Layer w0.254: U1.143@6.253,-14.85 6.25,-14.853 6.25,-16.975 4.453,-18.772 4.453,-25.903 10.138,-31.588 PORTS-C.28@10.138,-32.895
NetPORTS-C_29: PORTS-C.29 U1.144 | length 25
  Top Layer w0.254: U1.144@6.753,-14.85 6.733,-14.87 6.733,-17.138 4.911,-18.961 4.911,-25.714 10.24,-31.043 10.843,-31.043 11.425,-31.625 11.4,-31.65 11.4,-34.2 12.635,-35.435 PORTS-C.29@12.678,-35.435
NetPORTS-C_30: PORTS-C.30 U1.146 | length 22.8
  Top Layer w0.254: U1.146@7.753,-14.85 7.753,-16.79 5.368,-19.175 5.368,-25.525 10.429,-30.586 11.661,-30.586 12.678,-31.603 PORTS-C.30@12.678,-32.895
NetPORTS-C_31: PORTS-C.31 U1.147 | length 26.5
  Top Layer w0.254: U1.147@8.253,-14.85 8.233,-14.87 8.233,-16.956 5.825,-19.364 5.825,-25.335 10.619,-30.129 12.429,-30.129 13.975,-31.675 13.975,-34.192 PORTS-C.31@15.218,-35.435
NetPORTS-C_32: PORTS-C.32 U1.148 | length 24.2
  Top Layer w0.254: U1.148@8.753,-14.85 8.733,-14.87 8.733,-17.103 6.282,-19.554 6.282,-25.146 10.808,-29.672 13.222,-29.672 15.218,-31.668 PORTS-C.32@15.218,-32.895
NetPORTS-C_33: PORTS-C.33 U1.149 | length 28
  Top Layer w0.254: U1.149@9.253,-14.85 9.233,-14.87 9.233,-17.249 6.739,-19.743 6.739,-24.956 10.997,-29.214 14.114,-29.214 16.55,-31.65 16.55,-34.275 17.71,-35.435 PORTS-C.33@17.758,-35.435
NetPORTS-C_34: PORTS-C.34 U1.150 | length 25.7
  Top Layer w0.254: U1.150@9.753,-14.85 9.733,-14.87 9.733,-17.396 7.197,-19.933 7.197,-24.767 11.187,-28.757 14.932,-28.757 17.758,-31.583 PORTS-C.34@17.758,-32.895
NetPORTS-C_35: PORTS-C.35 U1.152 | length 29.7
  Top Layer w0.254: U1.152@10.753,-14.85 10.733,-14.87 10.733,-17.042 7.654,-20.122 7.654,-24.578 11.376,-28.3 15.8,-28.3 19.125,-31.625 19.125,-34.262 PORTS-C.35@20.298,-35.435
NetPORTS-C_36: PORTS-C.36 U1.154 | length 27.5
  Top Layer w0.254: U1.154@11.753,-14.85 11.753,-16.669 8.111,-20.311 8.111,-24.388 11.537,-27.814 16.514,-27.814 20.298,-31.598 PORTS-C.36@20.298,-32.895
NetPORTS-C_37: PORTS-C.37 U1.155 | length 31.3
  Top Layer w0.254: U1.155@12.253,-14.85 12.233,-14.87 12.233,-16.836 8.568,-20.501 8.568,-24.199 11.726,-27.357 17.307,-27.357 21.65,-31.7 21.65,-34.275 21.678,-34.275 PORTS-C.37@22.838,-35.435
NetPORTS-C_38: PORTS-C.38 U1.156 | length 28.9
  Top Layer w0.254: U1.156@12.753,-14.85 12.733,-14.87 12.733,-16.982 9.025,-20.69 9.025,-24.01 11.916,-26.9 18.05,-26.9 22.838,-31.688 PORTS-C.38@22.838,-32.895
NetPORTS-C_39: PORTS-C.39 U1.161 | length 155.9
  Top Layer w0.254: U1.161@14.853,-10.75 17.575,-10.75 18.632,-9.693 23.092,-9.693 24.299,-10.9 v1(25.564,-10.9) ; PORTS-C.39@25.378,-35.435 31.392,-35.435 32.114,-36.157 36.114,-36.157 37.6,-34.671 37.6,24.95 35.95,26.6 29.85,26.6 28.657,25.407 28.657,22.868 29.225,22.3 v1(30.4,22.3) v1@30.479,22.3
  Bottom Layer w0.254: v1@25.375,-10.65 26.475,-10.65 26.725,-10.9 26.725,-17.953 28.655,-19.883 30.667,-19.883 31.05,-19.5 31.048,-19.498 31.331,-19.215 31.331,-14.37 29.622,-12.661 29.622,20.172 30.4,20.95 v1(30.4,22.3) v1@30.479,22.3
NetPORTS-C_40: PORTS-C.40 U1.162 | length 149.1
  Top Layer w0.254: U1.162@14.853,-10.25 17.15,-10.25 18.164,-9.236 25.264,-9.236 v1@25.425,-9.075 ; PORTS-C.40@25.378,-32.895 29.498,-32.895 32.303,-35.7 35.925,-35.7 37.143,-34.482 37.143,22.882 35.925,24.1 32.05,24.1 31.275,24.875 v1(30.425,24.875)
  Bottom Layer w0.254: v1@25.425,-9.075 25.575,-9.225 26.575,-9.225 27.182,-9.832 27.182,-17.764 28.844,-19.426 30.474,-19.426 30.874,-19.026 30.874,-14.56 29.164,-12.85 29.164,22.664 30.425,23.925 v1(30.425,24.875)
  other v1: 25.564,-9.15
NetPORTS-D_4: PORTS-D.4 U1.165 | length 27.5
  Top Layer w0.254: U1.165@14.853,-8.75 U1.165@14.873,-8.77 ; U1.165@15.25,-8.73 16.864,-8.73 19.985,-5.609 25.318,-5.609 26.96,-7.251 26.96,-13.16 31.675,-17.875 PORTS-D.4@32.893,-17.875
NetPORTS-D_5: PORTS-D.5 U1.166 | length 29.6
  Top Layer w0.254: U1.166@15.45,-8.23 16.718,-8.23 19.796,-5.152 25.508,-5.152 27.417,-7.062 27.417,-12.367 31.575,-16.525 34.125,-16.525 35.315,-15.335 PORTS-D.5@35.433,-15.335
NetPORTS-D_6: PORTS-D.6 U1.167 | length 26.5
  Top Layer w0.254: U1.167@14.853,-7.73 16.571,-7.73 19.608,-4.694 19.609,-4.695 25.697,-4.695 27.875,-6.872 27.875,-11.6 31.625,-15.35 31.64,-15.335 PORTS-D.6@32.893,-15.335
NetPORTS-D_7: PORTS-D.7 U1.168 | length 28.5
  Top Layer w0.254: U1.168@15.225,-7.23 16.424,-7.23 19.418,-4.236 25.885,-4.236 28.332,-6.683 28.332,-10.957 31.4,-14.025 34.203,-14.025 PORTS-D.7@35.433,-12.795
NetPORTS-D_8: PORTS-D.8 U1.169 | length 25
  Top Layer w0.254: U1.169@14.853,-6.75 16.258,-6.75 19.229,-3.779 26.075,-3.779 28.789,-6.493 28.789,-9.889 31.695,-12.795 PORTS-D.8@32.893,-12.795
NetPORTS-D_9: PORTS-D.9 U1.171 | length 27.1
  Top Layer w0.254: U1.171@14.873,-5.73 U1.171@14.853,-5.75 16.611,-5.75 19.039,-3.322 26.264,-3.322 29.246,-6.304 29.246,-8.996 31.75,-11.5 33.9,-11.5 35.145,-10.255 PORTS-D.9@35.433,-10.255
NetPORTS-D_10: PORTS-D.10 U1.172 | length 23.4
  Top Layer w0.254: U1.172@14.873,-5.23 U1.172@14.853,-5.25 16.465,-5.25 18.85,-2.865 26.453,-2.865 29.703,-6.115 29.703,-8.228 31.73,-10.255 PORTS-D.10@32.893,-10.255
NetPORTS-D_11: PORTS-D.11 U1.175 | length 25
  Top Layer w0.254: U1.175@14.853,-3.75 16.593,-3.75 17.936,-2.408 26.643,-2.408 30.161,-5.925 30.161,-7.261 31.725,-8.825 34.323,-8.825 PORTS-D.11@35.433,-7.715
NetPORTS-D_12: PORTS-D.12 U1.176 | length 21
  Top Layer w0.254: U1.176@14.853,-3.25 U1.176@14.873,-3.27 ; U1.176@15.375,-3.23 16.466,-3.23 17.746,-1.95 26.832,-1.95 30.618,-5.736 30.618,-6.668 31.665,-7.715 PORTS-D.12@32.893,-7.715
NetPORTS-D_13: PORTS-D.13 U1.178 | length 23.8
  Top Layer w0.254: U1.178@14.873,-2.23 U1.178@14.853,-2.25 14.873,-2.27 15.802,-2.27 15.807,-2.275 16.775,-2.275 17.557,-1.493 27.022,-1.493 31.075,-5.547 31.075,-5.993 31.532,-6.45 34.175,-6.45 35.433,-5.192 PORTS-D.13@35.433,-5.175
NetPORTS-D_14: PORTS-D.14 U1.180 | length 19.3
  Top Layer w0.254: U1.180@15.425,-1.23 16.388,-1.23 16.582,-1.036 27.211,-1.036 31.35,-5.175 PORTS-D.14@32.893,-5.175
NetPORTS-D_15: PORTS-D.15 U1.181 | length 22
  Top Layer w0.254: U1.181@15.375,-0.73 16.242,-0.73 16.393,-0.579 28.254,-0.579 31.55,-3.875 34.193,-3.875 PORTS-D.15@35.433,-2.635
NetPORTS-D_16: PORTS-D.16 U1.182 | length 19.2
  Top Layer w0.254: U1.182@14.873,-0.27 U1.182@14.853,-0.25 14.873,-0.23 16.095,-0.23 16.204,-0.122 28.972,-0.122 31.485,-2.635 PORTS-D.16@32.893,-2.635
NetPORTS-D_17: PORTS-D.17 U1.183 | length 21.9
  Top Layer w0.254: U1.183@14.853,0.25 14.873,0.27 15.949,0.27 16.014,0.336 30.164,0.336 31.875,-1.375 33.775,-1.375 35.055,-0.095 PORTS-D.17@35.433,-0.095
NetPORTS-D_18: PORTS-D.18 U1.184 | length 18.4
  Top Layer w0.254: U1.184@14.853,0.75 14.873,0.77 15.802,0.77 15.825,0.793 30.775,0.793 31.663,-0.095 PORTS-D.18@32.893,-0.095
NetPORTS-D_19: PORTS-D.19 U1.185 | length 21.1
  Top Layer w0.254: U1.185@14.853,1.25 34.238,1.25 PORTS-D.19@35.433,2.445
NetPORTS-D_20: PORTS-D.20 U1.187 | length 18.6
  Top Layer w0.254: U1.187@14.873,2.27 U1.187@14.853,2.25 17.475,2.25 18.018,1.707 30.775,1.707 31.513,2.445 PORTS-D.20@32.893,2.445
NetPORTS-D_21: PORTS-D.21 U1.189 | length 22.1
  Top Layer w0.254: U1.189@15,3.27 17.102,3.27 18.207,2.164 30.439,2.164 31.95,3.675 34.123,3.675 PORTS-D.21@35.433,4.985
NetPORTS-D_22: PORTS-D.22 U1.190 | length 19.5
  Top Layer w0.254: U1.190@14.873,3.73 U1.190@14.853,3.75 17.268,3.75 18.397,2.622 29.422,2.622 31.785,4.985 PORTS-D.22@32.893,4.985
NetPORTS-D_23: PORTS-D.23 U1.191 | length 22.6
  Top Layer w0.254: U1.191@14.853,4.25 U1.191@14.873,4.23 ; U1.191@15.225,4.27 15.265,4.23 17.435,4.23 18.586,3.079 28.454,3.079 31.6,6.225 34.25,6.225 35.433,7.408 PORTS-D.23@35.433,7.525
NetPORTS-D_24: PORTS-D.24 U1.194 | length 20.7
  Top Layer w0.254: U1.194@14.873,5.73 U1.194@14.853,5.75 14.873,5.77 15.802,5.77 15.807,5.775 16.65,5.775 18.889,3.536 27.736,3.536 31.725,7.525 PORTS-D.24@32.893,7.525
NetPORTS-D_25: PORTS-D.25 U1.196 | length 24.6
  Top Layer w0.254: U1.196@14.873,6.73 U1.196@14.853,6.75 16.322,6.75 19.078,3.993 27.547,3.993 31.1,7.547 31.1,8.125 31.8,8.825 34.175,8.825 35.415,10.065 PORTS-D.25@35.433,10.065
NetPORTS-D_26: PORTS-D.26 U1.197 | length 22.4
  Top Layer w0.254: U1.197@14.853,7.25 16.468,7.25 19.268,4.45 27.357,4.45 30.643,7.736 30.643,9.143 31.575,10.075 31.585,10.065 PORTS-D.26@32.893,10.065
NetPORTS-D_27: PORTS-D.27 U1.198 | length 25.4
  Top Layer w0.254: U1.198@14.853,7.75 U1.198@14.873,7.73 ; U1.198@15.55,7.73 16.635,7.73 19.457,4.908 27.168,4.908 30.186,7.925 30.186,9.786 31.725,11.325 34.153,11.325 PORTS-D.27@35.433,12.605
NetPORTS-D_28: PORTS-D.28 U1.199 | length 23.5
  Top Layer w0.254: U1.199@14.853,8.25 U1.199@14.873,8.23 ; U1.199@15.075,8.23 16.781,8.23 19.647,5.365 26.978,5.365 29.728,8.115 29.728,10.553 31.78,12.605 PORTS-D.28@32.893,12.605
NetPORTS-D_29: PORTS-D.29 U1.200 | length 27.6
  Top Layer w0.254: U1.200@14.873,8.73 U1.200@14.853,8.75 16.908,8.75 19.815,5.843 26.73,5.843 29.271,8.385 29.271,11.646 31.55,13.925 34.125,13.925 35.345,15.145 PORTS-D.29@35.433,15.145
NetPORTS-D_30: PORTS-D.30 U1.203 | length 25.6
  Top Layer w0.254: U1.203@14.853,10.25 16.054,10.25 20.004,6.301 26.54,6.301 28.814,8.574 28.814,12.364 31.595,15.145 PORTS-D.30@32.893,15.145
NetPORTS-D_31: PORTS-D.31 U1.204 | length 29.3
  Top Layer w0.254: U1.204@14.853,10.75 16.201,10.75 20.193,6.758 26.351,6.758 28.357,8.764 28.357,13.132 31.675,16.45 34.198,16.45 PORTS-D.31@35.433,17.685
NetPORTS-D_32: PORTS-D.32 U1.205 | length 26.9
  Top Layer w0.254: U1.205@14.853,11.25 16.348,11.25 20.383,7.215 26.162,7.215 27.9,8.953 27.9,13.778 31.807,17.685 PORTS-D.32@32.893,17.685
NetPORTS-D_33: PORTS-D.33
NetPORTS-D_34: PORTS-D.34 U1.206 | length 28.8
  Top Layer w0.254: U1.206@14.853,11.75 14.873,11.73 16.514,11.73 20.572,7.672 25.972,7.672 27.442,9.142 27.442,13.967 31.575,18.1 31.575,19.85 31.95,20.225 PORTS-D.34@32.893,20.225
NetPORTS-D_35: PORTS-D.35
NetPORTS-D_36: PORTS-D.36
NetPORTS-D_37: PORTS-D.37
NetPORTS-D_38: PORTS-D.38
NetPORTS-D_39: PORTS-D.39
NetPORTS-D_40: PORTS-D.40
NetPOSRT-B_4: POSRT-B.4 U1.51 | length 24.1
  Top Layer w0.254: v1(-14.975,18.525) -13.225,18.525 -12.247,17.547 U1.51@-12.247,14.85
  Bottom Layer w0.254: POSRT-B.4@-32.889,19.21 -31.503,19.21 -30.725,18.432 -15.068,18.432 v1(-14.975,18.525)
NetPOSRT-B_5: POSRT-B.5 U1.52 | length 25.9
  Top Layer w0.254: v1(-14.975,16.85) -14.9,16.775 -13.3,16.775 -12.747,16.222 U1.52@-12.747,14.85
  Bottom Layer w0.254: POSRT-B.5@-35.429,16.67 -35.429,17.596 -35.05,17.975 -18.45,17.975 -17.375,16.9 -15.025,16.9 v1(-14.975,16.85)
NetPOSRT-B_10: POSRT-B.10 U1.63 | length 22.7
  Top Layer w0.254: POSRT-B.10@-32.889,11.59 -31.54,11.59 -29.241,9.291 -29.241,7.909 -25.697,4.365 -19.765,4.365 -16.399,7.73 U1.63@-15.425,7.73
NetPOSRT-B_11: POSRT-B.11 U1.64 | length 25.3
  Top Layer w0.254: POSRT-B.11@-35.429,9.05 -35.429,9.071 -34.3,10.2 -31.725,10.2 -29.702,8.177 -29.702,7.723 -25.886,3.908 -19.575,3.908 -16.233,7.25 U1.64@-14.847,7.25
NetPOSRT-B_12: POSRT-B.12 U1.65 | length 21.7
  Top Layer w0.254: POSRT-B.12@-32.889,9.05 -31.675,9.05 -26.075,3.45 -19.386,3.45 -16.106,6.73 -14.867,6.73 U1.65@-14.847,6.75
NetPOSRT-B_13: POSRT-B.13 U1.67 | length 23.8
  Top Layer w0.254: POSRT-B.13@-35.429,6.51 -34.139,7.8 -31.675,7.8 -26.868,2.993 -19.197,2.993 -16.46,5.73 U1.67@-15.3,5.73
NetPOSRT-B_14: POSRT-B.14 U1.68 | length 20.8
  Top Layer w0.254: POSRT-B.14@-32.889,6.51 -31.665,6.51 -31.625,6.55 -27.611,2.536 -19.007,2.536 -16.293,5.25 U1.68@-14.847,5.25
NetPOSRT-B_15: POSRT-B.15 U1.71 | length 22.5
  Top Layer w0.254: POSRT-B.15@-35.429,3.97 -35.28,3.97 -33.975,5.275 -31.7,5.275 -28.504,2.079 -18.818,2.079 -17.166,3.73 U1.71@-15.461,3.73
NetPOSRT-B_16: POSRT-B.16 U1.72 | length 19.7
  Top Layer w0.254: POSRT-B.16@-32.889,3.97 -31.645,3.97 -29.297,1.622 -18.628,1.622 -17,3.25 U1.72@-14.847,3.25
NetPOSRT-B_17: POSRT-B.17 U1.74 | length 21.7
  Top Layer w0.254: POSRT-B.17@-35.429,1.43 -34.234,2.625 -31.261,2.625 -29.8,1.164 -18.411,1.164 -17.345,2.23 U1.74@-15.25,2.23
NetPOSRT-B_18: POSRT-B.18 U1.76 | length 18.6
  Top Layer w0.254: POSRT-B.18@-32.889,1.43 -31.448,1.43 -30.725,0.707 -17.593,0.707 -17.05,1.25 U1.76@-14.847,1.25
NetPOSRT-B_19: POSRT-B.19 U1.78 | length 21
  Top Layer w0.254: POSRT-B.19@-35.429,-0.86 -34.319,0.25 U1.78@-14.847,0.25
NetPOSRT-B_20: POSRT-B.20 U1.79 | length 18
  Top Layer w0.254: POSRT-B.20@-32.889,-1.11 -31.685,-1.11 -30.782,-0.207 -15.819,-0.207 -15.796,-0.23 U1.79@-15.25,-0.23
NetPOSRT-B_21: POSRT-B.21 U1.80 | length 22
  Top Layer w0.254: POSRT-B.21@-35.429,-3.65 -35.429,-3.479 -34.325,-2.375 -31.536,-2.375 -29.825,-0.664 -17.45,-0.664 -17.364,-0.75 U1.80@-14.847,-0.75
NetPOSRT-B_22: POSRT-B.22 U1.81 | length 19.1
  Top Layer w0.254: POSRT-B.22@-32.889,-3.65 -31.725,-3.65 -29.197,-1.122 -17.639,-1.122 -17.531,-1.23 -14.867,-1.23 U1.81@-14.847,-1.25
NetPOSRT-B_23: POSRT-B.23 U1.85 | length 23.2
  Top Layer w0.254: POSRT-B.23@-35.429,-6.19 -35.265,-6.19 -33.9,-4.825 -31.096,-4.825 -27.85,-1.579 -18.911,-1.579 -17.215,-3.275 -15.801,-3.275 -15.796,-3.27 -14.867,-3.27 U1.85@-14.847,-3.25
NetPOSRT-B_24: POSRT-B.24 U1.86 | length 20.5
  Top Layer w0.254: POSRT-B.24@-32.889,-6.19 -31.59,-6.19 -27.436,-2.036 -19.101,-2.036 -17.387,-3.75 U1.86@-14.847,-3.75
NetPOSRT-B_25: POSRT-B.25 U1.87 | length 23.9
  Top Layer w0.254: POSRT-B.25@-35.429,-8.73 -34.1,-7.401 -31.625,-7.4 -26.718,-2.493 -19.29,-2.493 -17.533,-4.25 U1.87@-14.847,-4.25
NetPOSRT-B_26: POSRT-B.26 U1.90 | length 21.6
  Top Layer w0.254: POSRT-B.26@-32.889,-8.73 -31.655,-8.73 -25.875,-2.95 -19.961,-2.95 -17.181,-5.73 -14.867,-5.73 U1.90@-14.847,-5.75
NetPOSRT-B_27: POSRT-B.27 U1.93 | length 25.8
  Top Layer w0.254: POSRT-B.27@-35.429,-11.27 -35.245,-11.27 -34,-10.025 -31.65,-10.025 -29.389,-7.764 -29.389,-7.111 -25.702,-3.423 -20.134,-3.423 -16.308,-7.25 U1.93@-14.847,-7.25
NetPOSRT-B_28: POSRT-B.28 U1.94 | length 23.4
  Top Layer w0.254: POSRT-B.28@-32.889,-11.27 -31.655,-11.27 -31.65,-11.275 -28.932,-8.557 -28.932,-7.3 -25.512,-3.88 -20.324,-3.88 -16.454,-7.75 U1.94@-14.847,-7.75
NetPOSRT-B_29: POSRT-B.29 U1.95 | length 27.2
  Top Layer w0.254: POSRT-B.29@-35.429,-13.81 -35.385,-13.81 -34.1,-12.525 -31.7,-12.525 -28.475,-9.3 -28.475,-7.49 -25.323,-4.338 -20.513,-4.338 -16.621,-8.23 -14.867,-8.23 U1.95@-14.847,-8.25
NetPOSRT-B_30: POSRT-B.30 U1.96 | length 24.9
  Top Layer w0.254: POSRT-B.30@-32.889,-13.81 -31.66,-13.81 -28.018,-10.168 -28.018,-7.679 -25.134,-4.795 -20.702,-4.795 -16.767,-8.73 -14.867,-8.73 U1.96@-14.847,-8.75
NetPOSRT-B_31: POSRT-B.31 U1.97 | length 28.6
  Top Layer w0.254: POSRT-B.31@-35.429,-16.35 -35.2,-16.35 -33.95,-15.1 -31.675,-15.1 -27.56,-10.985 -27.56,-7.925 -24.887,-5.252 -20.892,-5.252 -16.894,-9.25 U1.97@-14.847,-9.25
NetPOSRT-B_32: POSRT-B.32 U1.100 | length 26.7
  Top Layer w0.254: POSRT-B.32@-32.889,-16.35 -31.65,-16.35 -27.103,-11.803 -27.103,-8.125 -24.687,-5.709 -21.081,-5.709 -16.041,-10.75 U1.100@-14.847,-10.75
NetPOSRT-B_33: POSRT-B.33 U1.101 | length 30.5
  Top Layer w0.254: POSRT-B.33@-35.429,-18.89 -35.29,-18.89 -34.05,-17.65 -31.725,-17.65 -26.646,-12.571 -26.646,-8.314 -24.498,-6.166 -21.271,-6.166 -16.207,-11.23 -14.867,-11.23 U1.101@-14.847,-11.25
NetPOSRT-B_34: POSRT-B.34 U1.102 | length 27.6
  Top Layer w0.254: POSRT-B.34@-32.889,-18.89 -31.665,-18.89 -26.189,-13.414 -26.189,-8.504 -24.309,-6.624 -21.46,-6.624 -16.353,-11.73 U1.102@-15.375,-11.73
NetPOSRT-B_35: POSRT-B.35 U1.106 | length 39.7
  Top Layer w0.254: POSRT-B.35@-35.429,-21.43 -35.429,-21.379 -34.2,-20.15 -31.622,-20.15 -27.15,-24.621 -10.388,-24.621 -8.348,-22.582 -8.348,-20.794 -12.247,-16.896 U1.106@-12.247,-14.85
NetPOSRT-B_36: POSRT-B.36 U1.107 | length 37
  Top Layer w0.254: POSRT-B.36@-32.889,-21.43 -32.819,-21.5 -30.918,-21.5 -27.34,-25.078 -10.198,-25.078 -7.891,-22.771 -7.891,-20.605 -11.747,-16.749 U1.107@-11.747,-14.85
NetPOSRT-B_37: POSRT-B.37 U1.108 | length 40.5
  Top Layer w0.254: POSRT-B.37@-35.429,-23.97 -34.109,-22.65 -30.415,-22.65 -27.529,-25.536 -10.009,-25.536 -7.434,-22.961 -7.434,-20.416 -11.247,-16.602 U1.108@-11.247,-14.85
NetPOSRT-B_38: POSRT-B.38 U1.109 | length 37.8
  Top Layer w0.254: POSRT-B.38@-32.889,-23.97 -29.741,-23.97 -27.719,-25.993 -9.819,-25.993 -6.977,-23.15 -6.977,-20.226 -10.747,-16.456 U1.109@-10.747,-14.85
NetRED_2: RED.2 VGA.1
NetU1_6: U1.6 U1.23 U1.32 U1.49 U1.60 U1.73 U1.84 U1.98 U1.110 U1.127 U1.136 U1.153 U1.164 U1.177 U1.188 U1.201 vc1.1 vc2.1 vc3.1 vc4.1 vc5.1 vc6.1 vc7.1 vc8.1 vc9.1 vc10.1 vc11.1 vc12.1 vc13.1 vc14.1 vc15.1 vc16.1 vc17.1 vc18.1 vc19.1 vc20.1 vc21.1 vc22.1 vc23.1 | length 436.4
  Top Layer w0.254: U1.98@-14.847,-9.75 -13.05,-9.75 -12.225,-8.925 v1(-12.225,-8.775) ; U1.84@-14.847,-2.75 -11.625,-2.75 -10.425,-1.55 v1(-8.5,-1.55) ; U1.73@-14.847,2.75 -12.325,2.75 -10.5,0.925 -8.625,0.925 v1(-8.6,0.95) ; U1.60@-14.847,9.25 -13.325,9.25 -12.45,8.375 v1(-11.9,8.375) ; v1(-11.25,11.925) -11.247,11.928 U1.49@-11.247,14.85 ; v1(-10.325,-12.775) -10.247,-12.853 U1.110@-10.247,-14.85 ; v1@-8.275,8.2 -7.25,8.2 ; v1(-5.075,-1.6) -4.075,-1.6 -3.075,-0.6 -3.075,2.025 -6.693,5.643 -6.693,7.643 -7.25,8.2 ; v1@-2.75,10.45 -2.747,10.453 U1.32@-2.747,14.85 ; v1(-1.825,-11.925) -1.747,-12.003 U1.127@-1.747,-14.85 ; U1.23@1.753,14.85 1.753,10.528 v1(1.725,10.5) 1.075,10.5 -1.225,8.2 -7.25,8.2 ; U1.136@2.753,-14.85 2.753,-11.947 v1@2.875,-11.825 ; v1@7.975,-1.1 8.1,-1.225 8.475,-1.225 10,-2.75 U1.177@14.853,-2.75 ; v1(8.025,1.4) 8.275,1.4 10.8,3.925 11.35,3.925 v1(11.625,4.2) 11.625,4.1 12.975,2.75 U1.188@14.853,2.75 ; v1(8.525,-11.725) 8.5,-11.7 10.175,-11.7 11.253,-12.778 U1.153@11.253,-14.85 ; v1(10.25,12.35) 10.253,12.353 U1.6@10.253,14.85 ; v1(12.275,8.3) 12.925,8.3 13.875,9.25 U1.201@14.853,9.25 ; v1(12.326,-8.075) 12.326,-8.976 12.6,-9.25 U1.164@14.853,-9.25
  Bottom Layer w0.254: vc16.1@-21.28,-12.825 vc16.1@-20.85,-12.395 ; vc6.1@-20.85,12.85 -18.975,12.85 -18.475,13.35 -18.475,16.775 -19.1,17.4 -30.375,17.4 -31.25,16.525 -31.25,-19.079 -30.366,-19.963 -22.203,-19.963 -20.85,-18.61 vc7.1@-20.85,-14.92 -20.52,-15.25 -14.125,-15.25 -13.775,-15.6 -13.775,-16.275 -13.75,-16.3 -13.75,-18.392 -13.742,-18.4 vc13.1@-13.742,-20.72 ; v1(-11.9,8.375) -11.9,5.625 -10.125,3.85 -7.625,3.85 -7.125,3.35 -7.125,1.55 -7.725,0.95 v1(-8.6,0.95) ; v1(-10.325,-12.775) -10.325,-11.175 -9.85,-10.7 -2.025,-10.7 -1.825,-10.9 v1(-1.825,-11.925) ; v1(-8.5,-1.55) -5.125,-1.55 v1(-5.075,-1.6) ; v1(12.275,8.3) 12.125,8.3 11.4,9.025 2.35,9.025 0.3,6.975 0.3,0 8.3,-8 12.25,-8 v1(12.326,-8.075) 12.813,-8.562 ; vc10.1@20.7,-12.5 vc11.1@20.7,-9.975
  Bottom Layer w0.762: vc7.1@-20.85,-14.92 vc16.1@-20.85,-12.395 -15.845,-12.395 v1(-12.225,-8.775) ; vc4.1@-20.85,2.752 vc3.1@-20.85,0.9 ; vc18.1@-20.85,10.326 -20.85,11.875 ; vc6.1@-20.85,12.85 -20.85,11.875 ; -20.425,1.278 -20.425,1.325 vc3.1@-20.85,0.9 ; vc13.1@-13.742,-20.72 vc14.1@-11.269,-20.72 -11.35,-20.639 -11.35,-18.575 -10.325,-17.55 v1(-10.325,-12.775) ; v1(-8.75,8.225) -11.75,8.225 v1(-11.9,8.375) ; vc21.1@-8.669,20.5 vc9.1@-11.25,20.5 v1(-11.25,11.925) -11.25,9.025 v1(-11.9,8.375) ; v1(-8.6,0.95) -10.011,0.95 -10.311,1.25 -14.675,1.25 -15.697,0.228 vc3.1@-20.85,0.228 vc3.1@-20.85,0.9 ; v1(-2.75,10.5) -1.8,11.45 0.525,11.45 1.475,10.5 v1(1.725,10.5) ; vc23.1@-1.375,-20.72 vc20.1@-3.848,-20.72 -3.55,-20.422 -3.55,-15.15 -1.825,-13.425 v1(-1.825,-11.925) -1.375,-11.925 -0.126,-10.676 1.626,-10.676 v1(2.875,-11.925) 4.425,-13.475 6.775,-13.475 v1@8.519,-11.731 ; vc15.1@-0.928,20.5 vc22.1@1.653,20.5 1.55,20.397 1.55,11.15 1.725,10.975 v1(1.725,10.5) ; vc19.1@6.045,-20.72 vc1.1@8.519,-20.72 v1@8.519,-11.731 ; v1(8.025,-1.1) v1(8.025,1.4) 16.075,1.4 17.475,2.8 20.55,2.8 vc2.1@20.7,2.65 vc5.1@20.7,5.175 ; v1(8.525,-11.725) v1@8.519,-11.731 ; vc17.1@9.394,20.5 vc8.1@11.975,20.5 11.975,16.7 10.25,14.975 v1(10.25,12.35) ; v1(11.625,4.2) 12.275,4.85 v1(12.275,8.3) 16.325,12.35 ; 12.813,-8.562 14.225,-9.975 vc11.1@20.7,-9.975 ; vc12.1@20.7,12.75 20.3,12.35 16.325,12.35 ; -20.85,11.875 -17.475,8.5 -12.025,8.5 v1(-11.9,8.375) ; v1(1.725,10.5) 2.175,10.5 4.15,12.475 10.125,12.475 v1(10.25,12.35) ; v1(10.25,12.35) 16.325,12.35
NetU1_17: U1.17 U1.38 U1.69 U1.89 U1.121 U1.142 U1.173 U1.193 vx1.2 vx2.2 vx3.2 vx4.2 vx5.2 vx6.2 vx7.2 vx8.2 vx9.2 vx10.2 vx11.2 vx12.2 vx13.2 vx14.2 | length 243.2
  Top Layer w0.254: U1.89@-14.847,-5.25 -12.303,-5.25 -11.602,-4.548 -8.977,-4.548 v1(-8.325,-5.2) ; U1.69@-14.847,4.75 -8.875,4.75 -8.8,4.675 -8.65,4.825 v1(-8.65,4.875) ; v1@-5.8,10.425 -5.747,10.478 U1.38@-5.747,14.85 ; v1(-5.05,-5.075) -2.575,-5.075 2,-9.65 3.05,-9.65 0.025,-6.625 0.025,-4.55 0.55,-4.025 1.782,-4.025 4.175,-1.632 4.175,8.925 4.675,9.425 4.675,9.6 ; U1.121@-4.747,-14.85 -4.747,-11.972 v1(-4.7,-11.925) -4.7,-9.95 v1@-4.625,-9.875 ; v1(4.675,10.5) v1@4.675,10.475 ; U1.17@4.753,14.85 4.733,14.83 4.733,10.533 v1@4.675,10.475 ; U1.142@5.753,-14.85 5.753,-12.328 5.325,-11.9 v1(5.825,-11.9) ; v1(8.025,-4.675) 8.1,-4.75 U1.173@14.853,-4.75 ; v1(8.025,5.3) 8.518,5.793 12.457,5.793 13,5.25 U1.193@14.853,5.25 ; v1(8.025,8.025) 6.25,8.025 4.675,9.6 ; 4.675,9.6 v1@4.675,10.475
  Bottom Layer w0.254: vx1.2@-6.322,-20.72 -6.322,-21.3 -6.4,-21.378 -6.4,-21.8 -6.1,-22.1 0.8,-22.1 1.05,-21.85 1.05,-20.769 vx3.2@1.099,-20.72 ; -5.625,9.075 -4.836,8.286 0.964,8.286 2.161,9.482 3.657,9.482 v1(4.675,10.5) ; v1(-4.625,-9.65) -4.625,-8.6 -4.325,-8.3 2.25,-8.3 2.525,-8.575 v1(2.525,-9.5) 4.967,-9.5 5.875,-10.408 5.875,-11.85 v1(5.825,-11.9) ; vx11.2@-3.508,20.5 -3.6,20.592 -3.6,21.65 -3.3,21.95 3.925,21.95 4.233,21.642 vx12.2@4.233,20.5 ; vx4.2@3.572,-20.72 3.572,-21.897 3.775,-22.1 10.575,-22.1 10.825,-21.85 10.825,-20.887 vx6.2@10.992,-20.72 ; v1@7.475,8.025 v1@7.7,7.8 ; v1@7.7,5.3 7.7,5.625 v1(8.025,5.3) ; v1@7.954,8.058 7.444,8.568 2.709,8.568 0.757,6.616 0.757,0.189 5.622,-4.675 v1(8.025,-4.675)
  Bottom Layer w0.762: vx13.2@-20.85,-9.871 vx7.2@-20.85,-7.346 -19.321,-7.346 -18.937,-7.346 -17.896,-7.346 -15.75,-5.2 v1(-8.325,-5.2) -5.175,-5.2 v1(-5.05,-5.075) ; vx2.2@-8.795,-20.72 vx1.2@-6.322,-20.72 -6.322,-12.722 -5.525,-11.925 v1(-4.7,-11.925) ; v1(-8.65,4.875) -7.45,4.875 -5.625,6.7 -5.625,9.075 -5.625,10.325 v1(-5.8,10.5) -5.8,20.211 vx10.2@-6.089,20.5 vx11.2@-3.508,20.5 ; vx3.2@1.099,-20.72 vx4.2@3.572,-20.72 ; vx12.2@4.233,20.5 vx14.2@6.814,20.5 ; v1(8.025,-4.675) 14.225,-4.675 16.85,-2.05 20.35,-2.05 vx8.2@20.7,-2.4 vx9.2@20.7,0.125 ; v1(8.025,5.3) v1(8.025,8.025) ; vx6.2@10.992,-20.72 vx5.2@13.466,-20.72